# Altium PCB cb_v1.PcbDoc
Units mm, origin at the board's own origin, x right, y up, seen from the top; angles counter-clockwise.
Board outline 140 x 55 mm, 2 copper layers (Top Layer, Bottom Layer); 32 components, 42 nets, 137 pads, 22 vias.
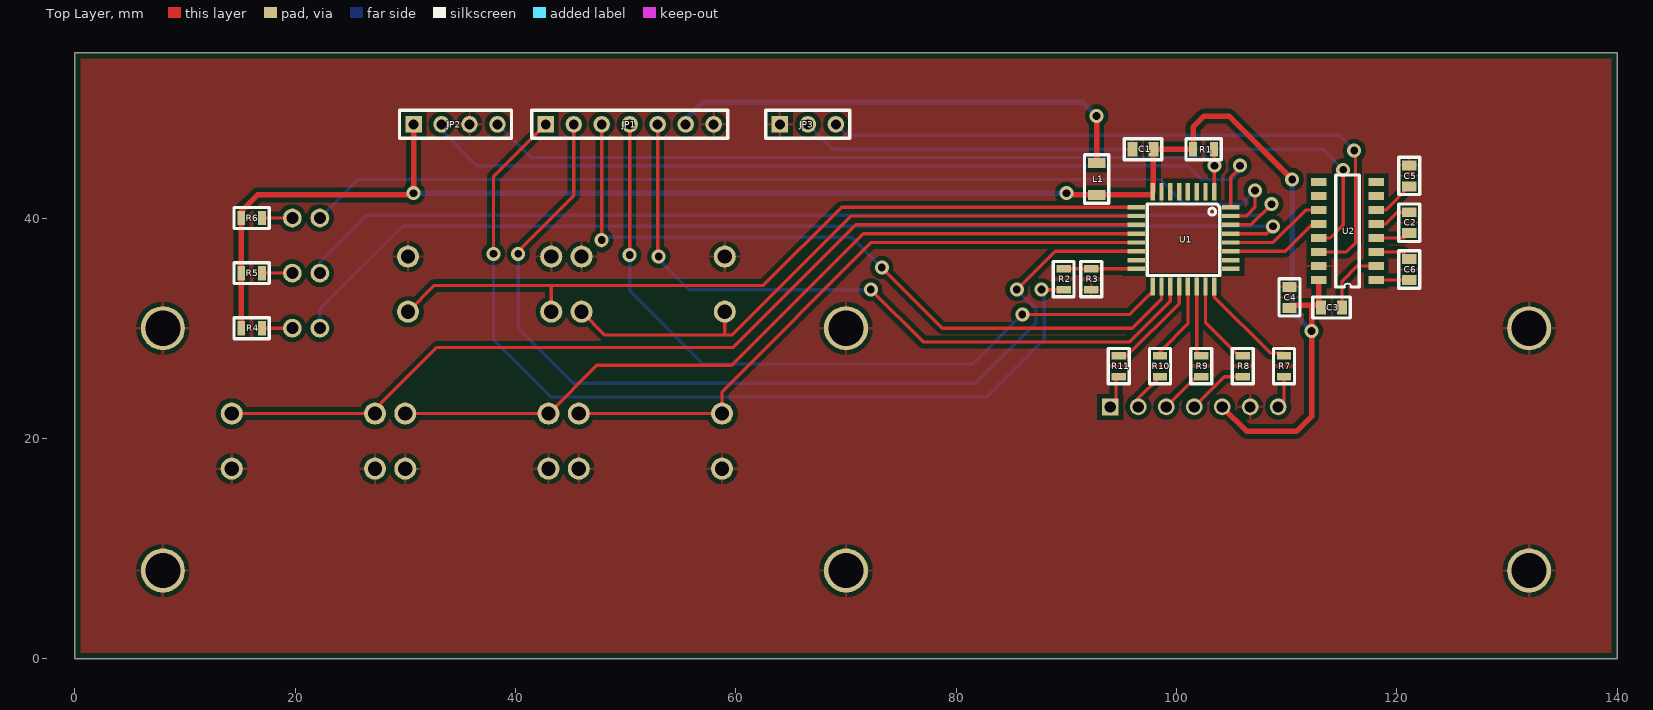
[diagram p0: Top Layer view]
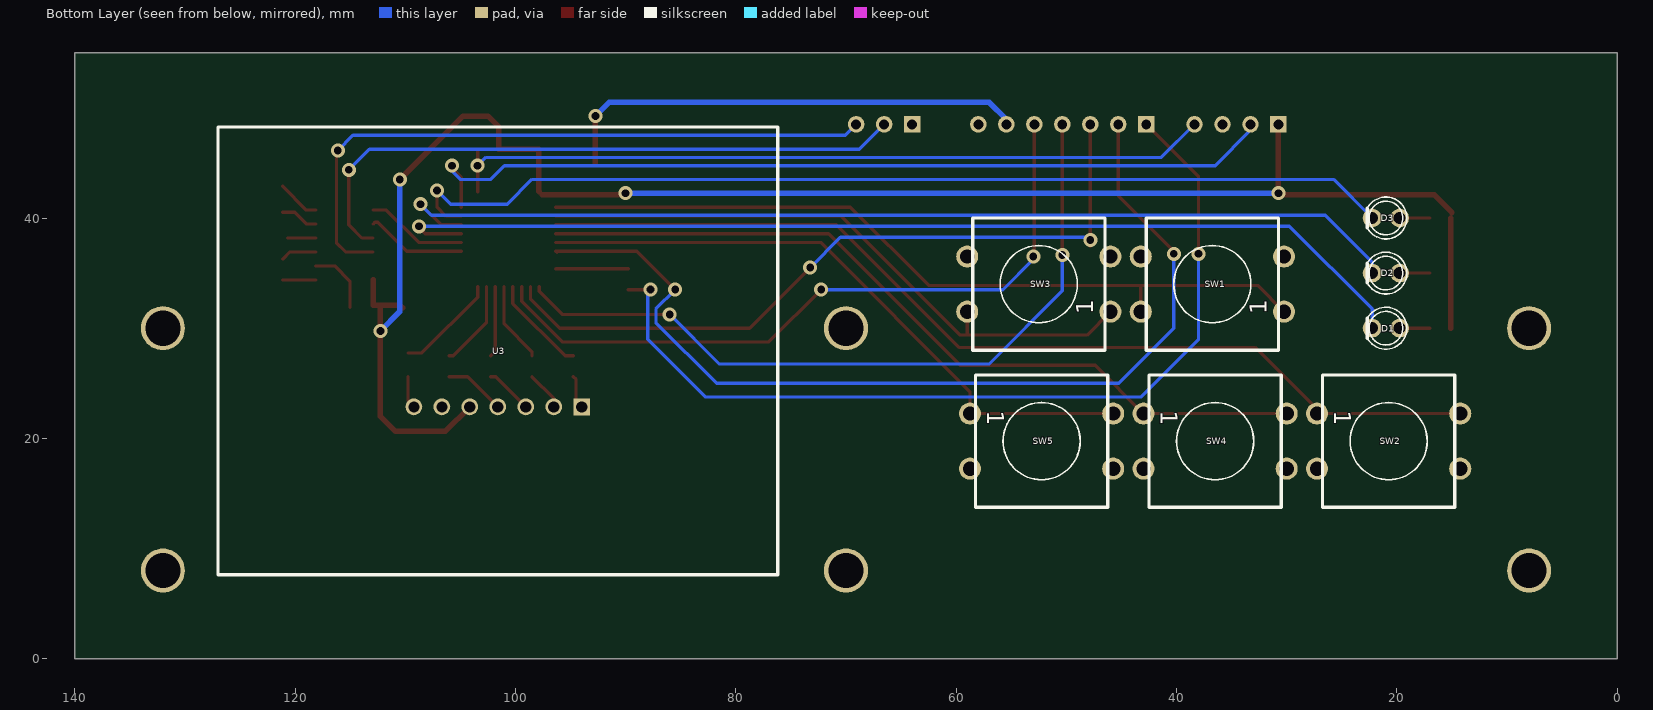
[diagram p1: Bottom Layer view, seen from below]

## Layer stack, top to bottom
Top Layer: signal copper 0.0356
Dielectric: dielectric 0.32, FR-4, Dk 4.8
Bottom Layer: signal copper 0.0356

## Board outline
0,0 140,0 140,55 0,55

## Design rules (kind name [scope] priority, off if disabled: settings)
Clearance Clearance_1 [InNamedPolygon('GND_T')] p1: gap=0.4
Clearance [All] p2: gap=0.25
HoleSize [All] p1: absolutevalues=TRUE maxlimit=5 minlimit=0.025 maxpercent=80.000 minpercent=20.000
HoleToHoleClearance [All] p1: gap=0.25 allowstackedmicrovias=TRUE
MinimumSolderMaskSliver [All] p1: minsoldermaskwidth=0
PasteMaskExpansion [All] p1: expansion=0.1
PolygonConnect [All] p1: connectstyle=Relief reliefconductorwidth=0.254 reliefentries=4 polygonreliefangle="90 Angle"
RoutingVias [All] p1: holewidth=0.7 width=1.25 viastyle="Through Hole" minholewidth=0.4 minwidth=0.5 maxholewidth=1 maxwidth=2
SilkToSilkClearance [All] p1: silktosilkclearance=0
SilkscreenOverComponentPads [All] p1: minsilkscreentomaskgap=0
SolderMaskExpansion [(IsVia)] p1: expansion=-0.12
Width [All] p1: maxlimit=3 minlimit=0.25 preferedwidth=0.3
22 further rules are at their usual default settings.

## Components (designator, comment, footprint, x,y, rotation, side; value= is the part's Value field where it differs from the comment)
C1 "100n" C-0805 96,46.25 r0 top
C2 "100n" C-0805 121.125,38.625 r90 top
C3 "100n" C-0805 113.125,31.875 r0 top
C4 "100n" C-0805 110.25,33.75 r270 top
C5 "100n" C-0805 121.125,42.875 r90 top
C6 "100n" C-0805 121.125,34.375 r90 top
D1 "RED" LED-DIP-1 21,30 r180 bottom locked
D2 "GREEN" LED-DIP-1 21,35 r180 bottom
D3 "YELLOW" LED-DIP-1 21,40 r180 bottom locked
JP1 "Header 7" HDR1X7 42.75,48.5 r0 top
JP2 "Header 4" HDR1X4 30.75,48.5 r0 top
JP3 "Header 3" HDR1X3 64,48.5 r0 top
L1 "SUPRESOR" R-1206 92.75,45 r270 top
R1 "22k" R-0805 101.5,46.25 r0 top
R2 "22k" R-0805 89.75,33.5 r90 top
R3 "22k" R-0805 92.25,35.4 r270 top
R4 "1k" R-0805 17,30 r180 top
R5 "1k" R-0805 17,35 r180 top
R6 "1k" R-0805 17,40 r180 top
R7 "1k" R-0805 109.75,27.5 r270 top
R8 "1k" R-0805 106,27.5 r270 top
R9 "1k" R-0805 102.25,27.5 r270 top
R10 "1k" R-0805 98.5,27.5 r270 top
R11 "1k" R-0805 94.75,27.5 r270 top
SW1 "SW-1" SW4-2 36.75,34 r0 bottom locked
SW2 "SW-1" SW4-2 20.75,19.75 r180 bottom locked
SW3 "SW-1" SW4-2 52.5,34 r0 bottom locked
SW4 "SW-1" SW4-2 36.5,19.75 r180 bottom locked
SW5 "SW-1" SW4-2 52.25,19.75 r180 bottom locked
U1 "STM8L151K6T6" QFP32 103.632,43.18 r180 top
U2 "HIN202" SO16-(SOT-109-1) 118.125,34.375 r180 top
U3 "ECMA0896-1" ECMA0896 76.2,48.26 r0 bottom locked

## Footprints (in the part's own frame and the unit in brackets; to place one, negate y for a bottom-side part, rotate by r counter-clockwise, add the part's x,y. Pads: shape width x height; smd on the part's side, far side on the other; paste and mask are expansions set on the pad)
C-0805 [mm]
  rect 0.9x1.3 smd: 1(0,0) 2(1.9,0)
  silkscreen extent -0.75,-0.95 2.65,0.95
ECMA0896 [mil]
  rect 60x60 hole 40: 1(700,1000)
  round 60 hole 40: 2(800,1000) 3(900,1000) 4(1000,1000) 5(1100,1000) 6(1200,1000) 7(1300,1000)
  silkscreen extent 0,0 2000,1600
HDR1X3 [mm] "Connector; Header; 3 Position"
  rect 1.5x1.5 hole 0.9: 1(0,0)
  round 1.5 hole 0.9: 2(2.54,0) 3(5.08,0)
  silkscreen extent -1.27,-1.27 6.35,1.27
HDR1X4 [mm] "Connector; Header; 4 Position"
  rect 1.5x1.5 hole 0.9: 1(0,0)
  round 1.5 hole 0.9: 2(2.54,0) 3(5.08,0) 4(7.62,0)
  silkscreen extent -1.27,-1.27 8.89,1.27
HDR1X7 [mm] "Connector; Header; 7 Position"
  rect 1.5x1.5 hole 0.9: 1(0,0)
  round 1.5 hole 0.9: 2(2.54,0) 3(5.08,0) 4(7.62,0) 5(10.16,0) 6(12.7,0) 7(15.24,0)
  silkscreen extent -1.27,-1.27 16.51,1.27
LED-DIP-1 [mm]
  round 1.7 hole 1.1: A(1.25,0) K(-1.25,0)
  silkscreen extent -1.68,-1.9 1.91,1.9
QFP32 [mm]
  rect 0.4x1.6 smd: 1(0.2,0.8) 2(1,0.8) 3(1.8,0.8) 4(2.6,0.8) 5(3.4,0.8) 6(4.2,0.8) 7(5,0.8) 8(5.8,0.8) 17(5.8,9.4) 18(5,9.4) 19(4.2,9.4) 20(3.4,9.4) 21(2.6,9.4) 22(1.8,9.4) 23(1,9.4) 24(0.2,9.4)
  rect 1.6x0.4 smd: 9(7.3,2.2) 10(7.3,3) 11(7.3,3.8) 12(7.3,4.6) 13(7.3,5.4) 14(7.3,6.2) 15(7.3,7) 16(7.3,7.8) 25(-1.3,7.8) 26(-1.3,7) 27(-1.3,6.2) 28(-1.3,5.4) 29(-1.3,4.6) 30(-1.3,3.8) 31(-1.3,3) 32(-1.3,2.2)
  silkscreen extent -0.3,1.9 6.3,8.4
R-0805 [mm]
  rect 0.7x1.3 smd: 1(0,0) 2(1.9,0)
  silkscreen extent -0.65,-0.95 2.55,0.95
R-1206 [mm]
  rect 0.9x1.6 smd: 1(0,0) 2(2.9,0)
  silkscreen extent -0.75,-1.1 3.65,1.1
SO16-(SOT-109-1) [mm]
  rect 1.4x0.7 smd: 1(0,0) 2(0,-1.27) 3(0,-2.54) 4(0,-3.81) 5(0,-5.08) 6(0,-6.35) 7(0,-7.62) 8(0,-8.89) 9(5.2,-8.89) 10(5.2,-7.62) 11(5.2,-6.35) 12(5.2,-5.08) 13(5.2,-3.81) 14(5.2,-2.54) 15(5.2,-1.27) 16(5.2,0)
  silkscreen extent 1.54,-9.52 3.66,0.64
SW4-2 [mm]
  round 2 hole 1.3: 1(-6.5,2.5) 2(-6.5,-2.5) 3(6.5,-2.5) 4(6.5,2.5)
  silkscreen extent -6,-6 6,6

## Part data
C1 C2 C3 C4 C5 C6: library part C
D1 D2 D3: library part LED
JP1: "Header, 7-Pin"
JP2: "Header, 4-Pin"
JP3: "Header, 3-Pin"
R1 R2 R3 R4 R5 R6 R7 R8 R9 R10 R11: library part R
U1: library part STM32L151
U2: "RS232 driver"
U3: library part ECMA0896

## Free pads (board coordinates)
  round 4 hole 3.2: 0(8,8) 1(8,30) 2(132,30) 3(132,8) 4(70,30) 5(70,8)

## Via types
v1: diameter 1.27, hole 0.711, Top Layer to Bottom Layer, 22 vias

## Nets (pads, with @x,y where several pads share a name; then routed paths per layer and width w, separated by ;. In a path a pad name is that pad's centre, name@x,y a point inside that pad or via, vN(x,y) a via of type N, cw(c..) or ccw(c..) an arc to the next point about the centre after c; other vN are vias at no path point)
A0: R11.1 U1.20 | length 9
  Top Layer w0.3: R11.1 95.5,27.5 100.232,32.232 U1.20
CS: R10.1 U1.21 | length 7.3
  Top Layer w0.3: R10.1 98.5,27.875 101.032,30.407 U1.21
EN: JP1.4 U1.17 | length 68.8
  Top Layer w0.3: v1(50.37,36.63) JP1.4 ; v1(86,31.25) 95.75,31.25 97.832,33.332 U1.17 U1.17@97.832,33.457
  Bottom Layer w0.3: v1(50.37,36.63) 50.37,33.38 57,26.75 81.5,26.75 v1(86,31.25)
GND: C1.1 C4.1 C5.2 JP1.7 JP2.3 JP3.1 pad.0 pad.1 pad.2 pad.3 pad.4 pad.5 R3.2 SW1.2 SW1.3 SW2.2 SW2.3 SW3.2 SW3.3 SW4.2 SW4.3 SW5.2 SW5.3 U1.7 U2.15 U3.6
LED1: D1.K U1.29 | length 95.2
  Top Layer w0.3: U1.29 108.205,38.58 v1@108.625,39
  Bottom Layer w0.3: D1.K 22.25,31.75 29.75,39.25 v1(108.75,39.25)
LED2: D2.K U1.30 | length 94
  Top Layer w0.3: U1.30 106.755,39.38 v1(108.625,41.25)
  Bottom Layer w0.3: D2.K 22.25,36 26.5,40.25 107.625,40.25 v1(108.625,41.25)
LED3: D3.K U1.31 | length 91.6
  Top Layer w0.3: U1.31 106.305,40.18 107.125,41 v1@107.125,42.25
  Bottom Layer w0.3: D3.K 25.75,43.5 98.5,43.5 100.75,41.25 105.875,41.25 v1(107.125,42.5)
NetC2_1: C2.1 U2.4 | length 2.6
  Top Layer w0.3: U2.4 C2.1@120.685,38.185
NetC2_2: C2.2 U2.5 | length 3.4
  Top Layer w0.3: U2.5 118.955,39.455 120.025,40.525 C2.2
NetC3_2: C3.2 U2.2 | length 6.1
  Top Layer w0.3: C3.2 115.025,34.275 116.395,35.645 U2.2
NetC5_1: C5.1 U2.6 | length 3.9
  Top Layer w0.3: U2.6 118.975,40.725 C5.1
NetC6_1: C6.1 U2.1 | length 3
  Top Layer w0.3: U2.1 C6.1
NetC6_2: C6.2 U2.3 | length 3.3
  Top Layer w0.3: U2.3 120.485,36.915 C6.2
NetD1_A: D1.A R4.1 | length 2.7
  Top Layer w0.3: R4.1 D1.A
NetD2_A: D2.A R5.1 | length 2.8
  Top Layer w0.3: R5.1 D2.A
NetD3_A: D3.A R6.1 | length 2.8
  Top Layer w0.3: R6.1 D3.A
NetJP1_6: JP1.6 L1.1 | length 43.2
  Top Layer w0.5: L1.1 v1(92.75,49.25)
  Bottom Layer w0.5: JP1.6 55.45,48.95 57,50.5 91.5,50.5 v1(92.75,49.25)
NetR2_2: R2.2 R3.1 U1.16 | length 6.6
  Top Layer w0.3: R2.2 96.312,35.4 U1.16
NetR7_2: R7.2 U3.7 | length 3
  Top Layer w0.3: U3.7 109.75,23.39 R7.2
NetR8_2: R8.2 U3.4 | length 5.5
  Top Layer w0.3: U3.4 101.61,22.86 104.35,25.6 R8.2
NetR9_2: R9.2 U3.3 | length 4.3
  Top Layer w0.3: U3.3 101.8,25.6 R9.2
NetR10_2: R10.2 U3.2 | length 3.6
  Top Layer w0.3: U3.2 96.52,23.62 R10.2
NetR11_2: R11.2 U3.1 | length 3.1
  Top Layer w0.3: U3.1 94.5,23.38 94.5,25.35 R11.2
NetSW1_1: SW1.1 SW1.4 U1.9 | length 72.4
  Top Layer w0.3: SW1.1 32.625,33.875 43.25,33.875 ; SW1.4 43.25,33.875 ; U1.9 69.605,40.98 62.5,33.875 43.25,33.875
NetSW2_1: SW2.1 SW2.4 U1.11 | length 89.4
  Top Layer w0.3: SW2.4 SW2.1 27.25,22.625 32.875,28.25 59.75,28.25 67.875,36.375 70.88,39.38 U1.11
NetSW3_1: SW3.1 SW3.4 U1.10 | length 57.8
  Top Layer w0.3: SW3.1 48.125,29.375 59,29.375 ; SW3.4 59,29.375 ; U1.10 71.25,40.18 70.43,40.18 59.625,29.375 59,29.375
NetSW4_1: SW4.1 SW4.4 U1.12 | length 73.1
  Top Layer w0.3: SW4.4 SW4.1 47.375,26.625 59.625,26.625 71.58,38.58 U1.12
NetSW5_1: SW5.1 SW5.4 U1.13 | length 58.2
  Top Layer w0.3: SW5.4 SW5.1 58.75,24.25 72.28,37.78 U1.13
PWM: JP1.2 U1.14 | length 88.1
  Top Layer w0.3: v1(40.25,36.75) 40.25,37 45.29,42.04 JP1.2 ; v1(85.5,33.5) 88.98,36.98 U1.14 U1.14@96.227,36.875
  Bottom Layer w0.3: v1(40.25,36.75) 40.25,30 45.25,25 81.75,25 87.25,30.5 87.25,31.75 v1(85.5,33.5)
RESETLCD: R7.1 U1.24 | length 9.4
  Top Layer w0.3: U1.24 103.432,32.818 108.5,27.75 R7.1@109.75,27.75
REVERSE: JP1.3 U1.18 | length 67.6
  Top Layer w0.3: v1@47.83,37.42 v1(47.83,38) JP1.3 ; v1(73.25,35.5) 78.75,30 96,30 98.632,32.632 U1.18
  Bottom Layer w0.3: v1(47.83,38) 48.08,38.25 70.5,38.25 v1(73.25,35.5)
RST: JP2.4 R1.2 U1.1 | length 70.5
  Top Layer w0.3: R1.2 103.432,46.218 v1(103.432,44.75) U1.1
  Bottom Layer w0.3: JP2.4 41.37,45.5 102.682,45.5 v1(103.432,44.75)
RXD0: U1.27 U2.12 | length 9.2
  Top Layer w0.3: U1.27 109.855,36.98 112.5,39.625 112.755,39.625 U2.12
RXD232: JP3.2 U2.13 | length 58
  Top Layer w0.3: U2.13 113.935,38.185 115.125,39.375 v1(115.125,44.375)
  Bottom Layer w0.3: JP3.2 68.79,46.25 113.25,46.25 v1(115.125,44.375)
SCLK: R8.1 U1.23 | length 7.9
  Top Layer w0.3: U1.23 102.632,30.493 105.625,27.5 R8.1
SDATA: R9.1 U1.22 | length 6.5
  Top Layer w0.3: U1.22 101.832,27.918 R9.1
SENSE: JP1.1 R2.1 | length 82.4
  Top Layer w0.3: v1(38,36.75) 38,43.75 JP1.1 ; v1(87.75,33.5) R2.1
  Bottom Layer w0.3: v1(38,36.75) 38,29 43.25,23.75 82.75,23.75 88.004,29.004 88.004,33.246 v1(87.75,33.5)
SWIM: JP2.2 U1.32 | length 79.9
  Top Layer w0.3: U1.32 104.932,43.682 v1@106,44.75
  Bottom Layer w0.3: JP2.2 33.29,47.96 36.5,44.75 101,44.75 102.25,43.5 105,43.5 105.75,44.25 v1(105.75,44.75)
TXD0: U1.28 U2.11 | length 9.2
  Top Layer w0.3: U1.28 108.78,37.78 111.725,40.725 U2.11
TXD232: JP3.3 U2.14 | length 60.1
  Top Layer w0.3: U2.14 115.415,36.915 116.25,37.75 116.25,44 ; 116.25,44.25 116.25,44 ; v1@116.25,45.875 116.25,44
  Bottom Layer w0.3: JP3.3 70.08,47.5 114.75,47.5 v1(116.125,46.125)
V_CONT: JP1.5 U1.19 | length 64.5
  Top Layer w0.3: v1@52.91,36.41 JP1.5 ; v1(72.25,33.5) 77,28.75 95.75,28.75 99.432,32.432 U1.19
  Bottom Layer w0.3: v1@53,36.25 55.75,33.5 v1(72.25,33.5)
  other v1: 53,36.5
VCC: C1.2 C3.1 C4.2 JP2.1 L1.2 R1.1 R4.2 R5.2 R6.2 U1.8 U2.16 U3.5 | length 160.2
  Top Layer w0.5: R6.2@15,40.5 16.6,42.1 30.75,42.1 JP2.1 ; R4.2 R5.2 R6.2 ; v1(90,42.25) 90.15,42.1 L1.2 97.552,42.1 ; U1.8 97.9,42.448 C1.2 R1.1 101.5,48.25 102.5,49.25 104.75,49.25 v1(110.5,43.5) ; U3.5 106.375,20.625 110.875,20.625 112.25,22 v1(112.25,29.75) 112.25,32.075 ; C4.2 110.475,32.075 112.925,32.075 U2.16
  Bottom Layer w0.5: v1(30.75,42.25) v1(90,42.25) ; v1(110.5,43.5) 110.5,31.5 v1(112.25,29.75)
pads on no net: U1.2 U1.3 U1.4 U1.5 U1.6 U1.15 U1.25 U1.26 U2.7 U2.8 U2.9 U2.10

## Polygon pours and split planes (outlines as drawn)
GND on Top Layer "GND_T" (solid, remove dead copper, pour order 1000): 0,0 0.25,0.25 140,0.25 140,54.75 139.75,55 -0.5,55

## Silkscreen, mask and mechanical layers (free items; w line width, h text height)
Mechanical 1:
  lines w0.2: -10,-5 150,-5 150,60 -10,60 -10,-5

## Text inside footprints (layer, text, board x,y; h text height)
SW1: Bottom Overlay "1" at 31.8,31.26 h1.52 r270
SW2: Bottom Overlay "1" at 25.7,22.49 h1.52 r90
SW3: Bottom Overlay "1" at 47.55,31.26 h1.52 r270
SW4: Bottom Overlay "1" at 41.45,22.49 h1.52 r90
SW5: Bottom Overlay "1" at 57.2,22.49 h1.52 r90